# Altium PCB IPG_Rigid.PcbDoc (part 7 of 13)
Units mm, origin at the board's own origin, x right, y up, seen from the top; angles counter-clockwise.
Board outline 69.6 x 90.73 mm, 10 copper layers (TOP, DHOR, DVERT, GND 1, POWER, GND 2, GND 3, AVERT, AHOR, BOT), stack 1.198 mm thick; 745 components, 398 nets, 1997 pads, 2678 vias.
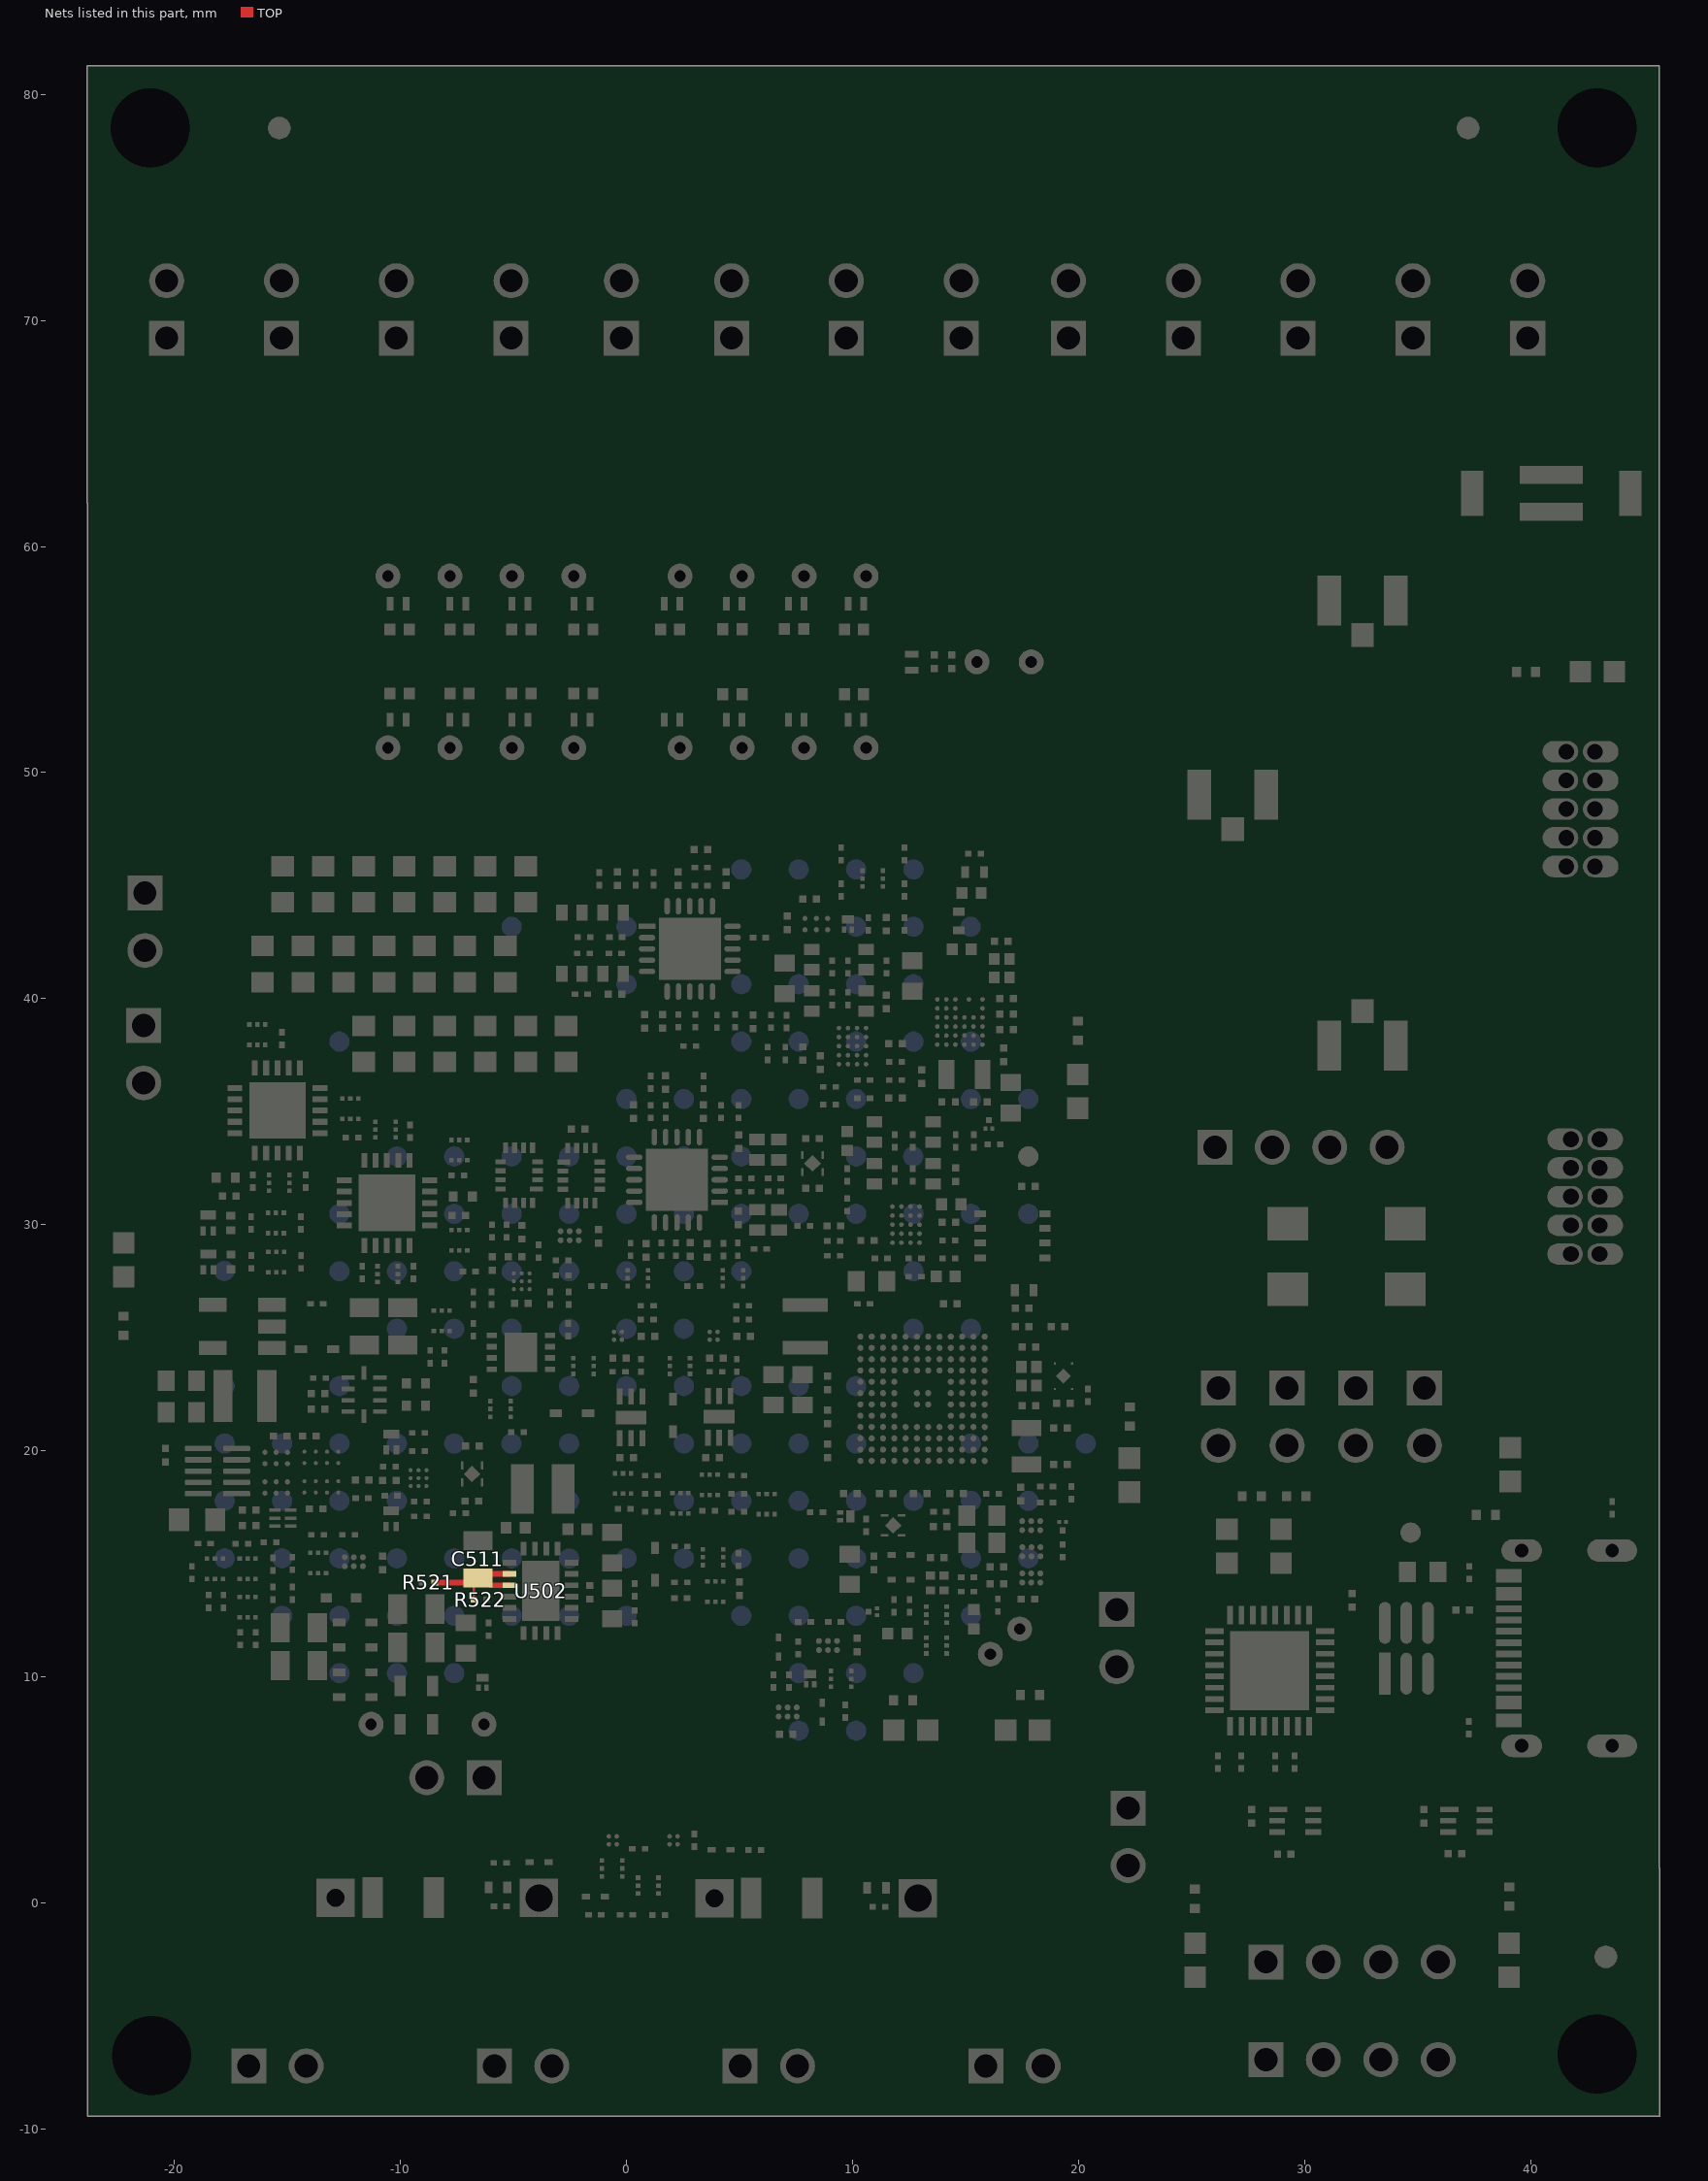
[diagram p11: the nets of this part, all layers, seen from the top]

## Part data (continued)
Y300: "48 MHz Â±10ppm Crystal 10pF 100 Ohms 4-SMD, No Lead", Manufacturer="ECS Inc.", Medical Grade MFR=TBD, Package Description="4-SMD, No Lead", Rating=N/A, Supplier Part Number 1=XC3037CT-ND, Category=Crystal, Length (mm)=1.20, Manufacturer Part Number=ECS-480-10-48-CKY-TR, Medical Grade MFR PN=TBD, PCB Footprint=TBD, Supplier 1=Digi-Key, Thickness (mm)=0.33, Width (mm)=1.00
Y301 Y401: "CRYSTAL 32.7680KHZ 6PF SMD", Manufacturer="Micro Crystal", Medical Grade MFR PN=CC8V-T1A32.768kHz6.0pF±20ppmTAQM, Package Description=CC8V, Rating=N/A, Supplier Part Number 1=2195-CM8V-T1A-32.768KHZ-6PF-20PPM-TA-QCCT-ND, Category=Crystal, Length (mm)=2.00, Manufacturer Part Number=CM8V-T1A-32.768KHZ-6PF-20PPM-TA-QC, Medical Grade MFR="Micro Crystal", PCB Footprint=TBD, Review=020823, Status=Approved, Supplier 1=Digi-Key, Thickness (mm)=0.67, Width (mm)=1.20
Y400: "32 MHz Â±10ppm Crystal 10pF 100 Ohms 4-SMD, No Lead", Manufacturer="ECS Inc.", Medical Grade MFR=TBD, Package Description="4-SMD, No Lead", Rating=N/A, Supplier Part Number 1=XC3036CT-ND, Category=Crystal, Length (mm)=1.20, Manufacturer Part Number=ECS-320-10-48-CKY-TR, Medical Grade MFR PN=TBD, PCB Footprint=TBD, Supplier 1=Digi-Key, Thickness (mm)=0.33, Width (mm)=1.00

## Free pads (board coordinates)
  round 0 hole 3.5 unplated paste-2539.97 mask+0.102: 2(-21.01,-6.754)

## Via types
v1: diameter 0.203, hole 0.102, TOP to DHOR, tented top, 561 vias
v2: diameter 0.203, hole 0.102, DHOR to DVERT, tented top, 481 vias
v3: diameter 0.305/0.305/0.305/0.305/0.305/0.305 (per signal layer), hole 0.152, DVERT to AVERT, 397 vias
v4: diameter 0.305/0.305/0/0.305/0.305/0.305 (per signal layer), hole 0.152, DVERT to AVERT, tented top, 283 vias
v5: diameter 0.305/0.305/0.305/0.305/0/0.305/0.305/0.305/0.305/0.305 (per signal layer), hole 0.152, TOP to BOT, 259 vias
v6: diameter 0.305, hole 0.152, TOP to BOT, tented both sides, 169 vias
v7: diameter 0.305/0.305/0.305/0.305/0/0.305/0.305/0.305/0.305/0.305 (per signal layer), hole 0.152, TOP to BOT, tented both sides, 140 vias
v8: diameter 0.203, hole 0.102, AVERT to AHOR, tented top, 101 vias
v9: diameter 0.305/0.305/0.305/0.305/0.305/0.305 (per signal layer), hole 0.152, DVERT to AVERT, tented top, 79 vias
v10: diameter 0.305/0/0/0.305/0/0.305/0.305/0/0/0.305 (per signal layer), hole 0.152, TOP to BOT, tented both sides, 74 vias
v11: diameter 0.305/0.305/0.305/0.305/0.305/0.305/0.305/0.305/0.305/0.305 (per signal layer), hole 0.152, TOP to BOT, tented both sides, 66 vias
v12: diameter 0.203, hole 0.102, AHOR to BOT, tented both sides, 31 vias
v13: diameter 0.203, hole 0.102, DHOR to DVERT, tented both sides, 9 vias
v14: diameter 0.203/0.203 (per signal layer), hole 0.102, DHOR to DVERT, tented top, 7 vias
v15: diameter 0.203/0.203 (per signal layer), hole 0.102, TOP to DHOR, tented top, 7 vias
v16: diameter 0.203, hole 0.102, TOP to DHOR, tented both sides, 5 vias
v17: diameter 0.305, hole 0.152, DVERT to AVERT, tented both sides, 2 vias
v18: diameter 0.305/0.305/0/0.305/0.305/0.305 (per signal layer), hole 0.152, DVERT to AVERT, tented both sides, 2 vias
v19: diameter 0.305, hole 0.152, DVERT to AVERT, tented top, 2 vias
v20: diameter 0.305/0/0/0.305/0.305/0.305/0.305/0/0/0.305 (per signal layer), hole 0.152, TOP to BOT, tented both sides, 1 vias
v21: diameter 0.305/0.305/0/0.305/0.305/0.305 (per signal layer), hole 0.152, DVERT to AVERT, 1 vias
v22: diameter 0.203, hole 0.102, TOP to BOT, tented top, 1 vias

## Nets (pads, with @x,y where several pads share a name; then routed paths per layer and width w, separated by ;. In a path a pad name is that pad's centre, name@x,y a point inside that pad or via, vN(x,y) a via of type N, cw(c..) or ccw(c..) an arc to the next point about the centre after c; other vN are vias at no path point)
+DCDC_IN: C511.2 R521.2 R522.1 U502.2 U502.3 | length 4.9
  TOP w0.102: R522.1@-6.757,13.411 -6.714,13.411 -6.757,13.454 C511.2@-6.757,14.193
  TOP w0.254: R521.2@-8.483,14.173 -6.776,14.173 -6.757,14.193 C511.2@-6.575,14.375 ; C511.2@-6.4,14.55 U502.2@-5.175,14.55 ; C511.2@-6.025,14.05 U502.3@-5.175,14.05